# Altium PCB radarr.PcbDoc (part 1 of 3)
Units mm, origin at the board's own origin, x right, y up, seen from the top; angles counter-clockwise.
Board outline 98.42 x 99.44 mm, 4 copper layers (Top Layer, Signal Layer 1, Signal Layer 2, Bottom Layer), stack 1.596 mm thick; 146 components, 99 nets, 534 pads, 3373 vias.
Unrouted connection lines stored in the file: 90.
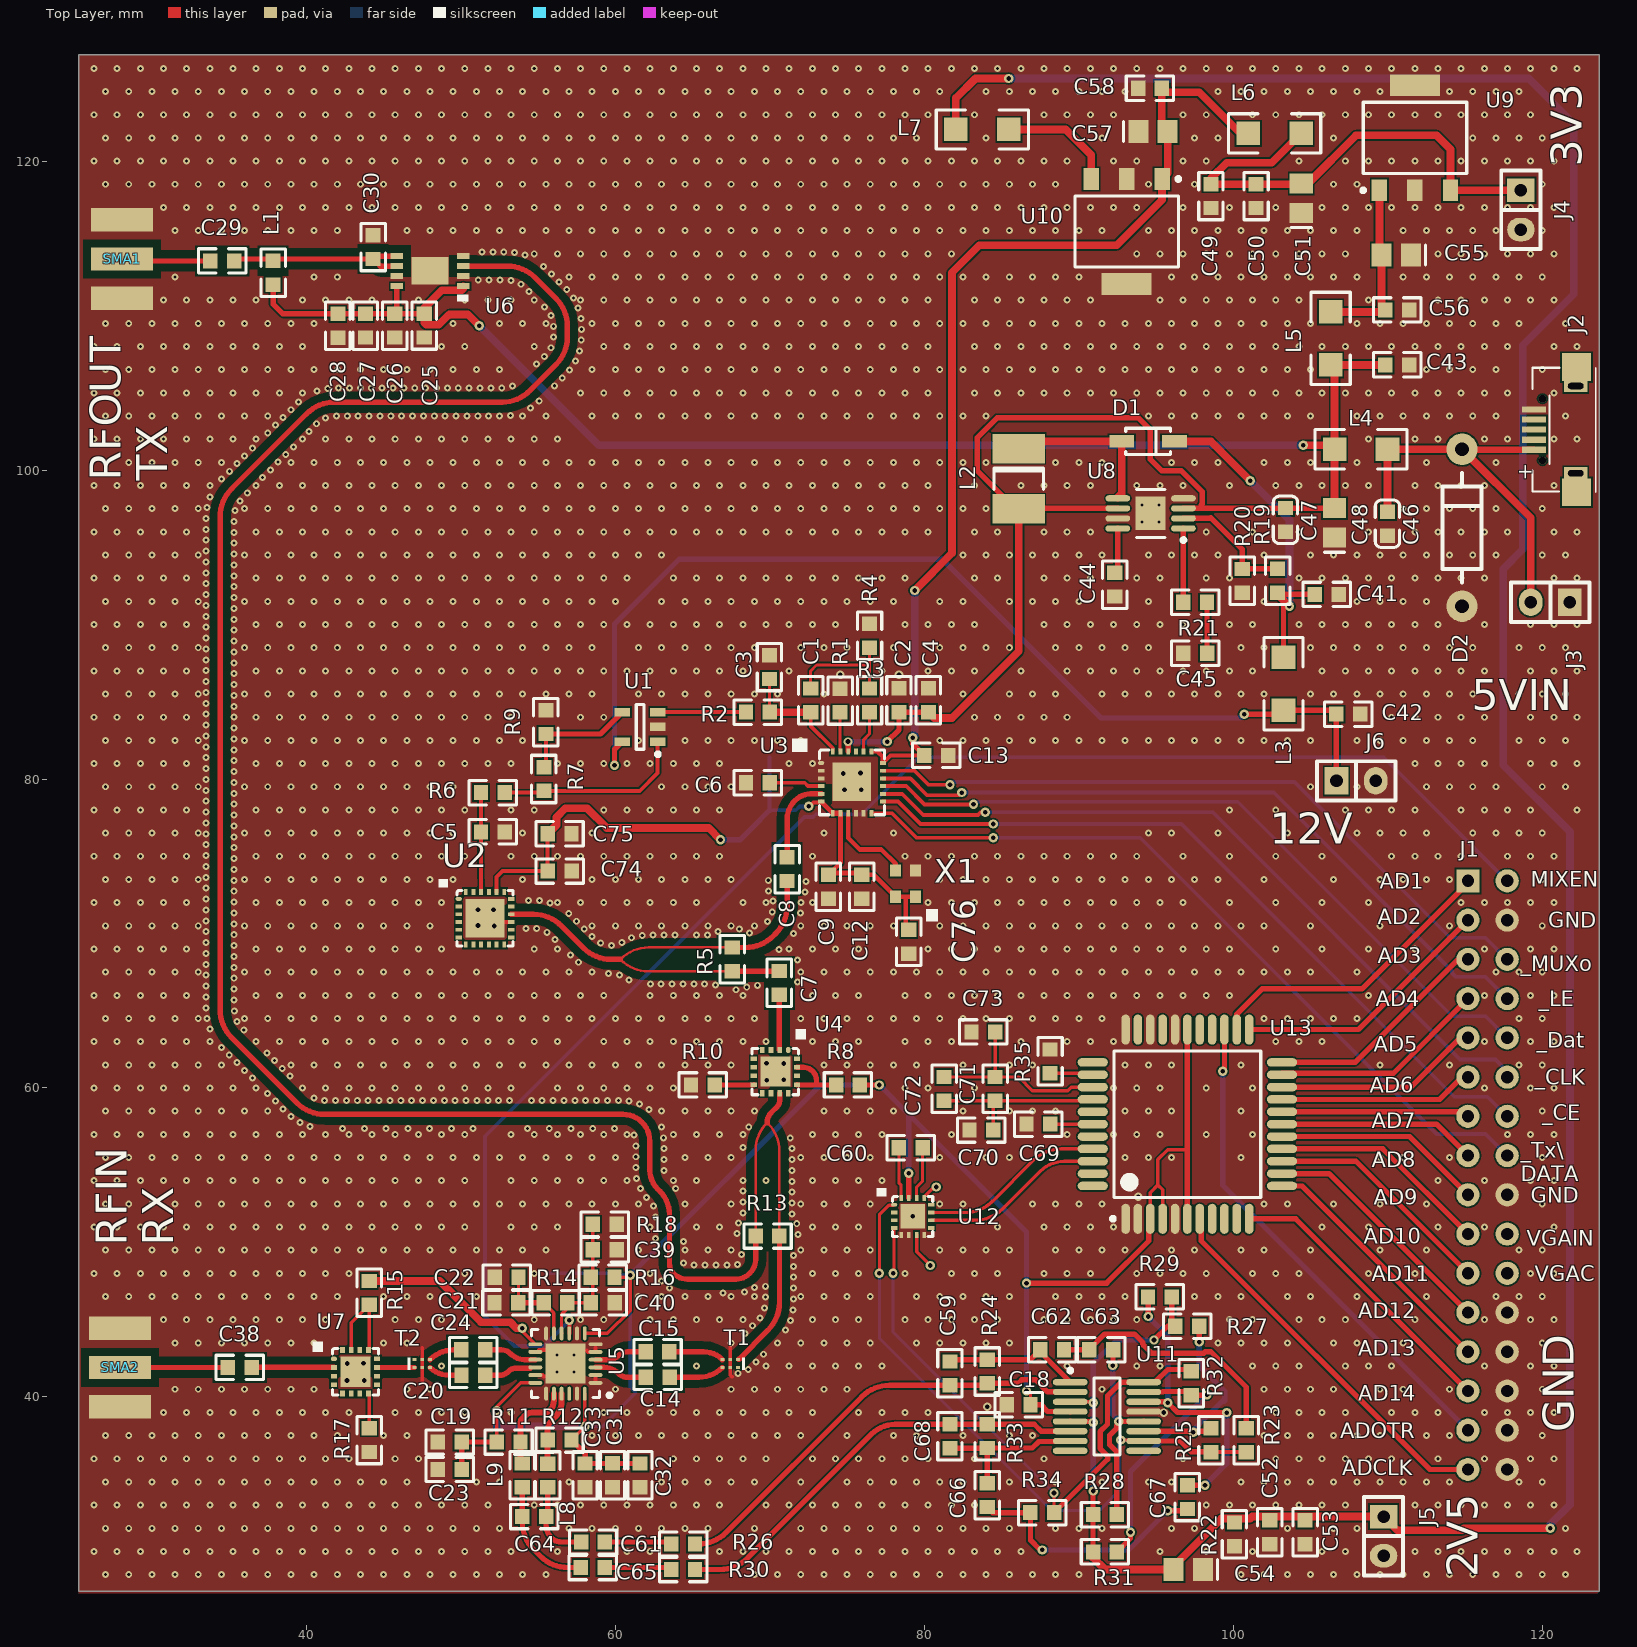
[diagram p0: Top Layer view]
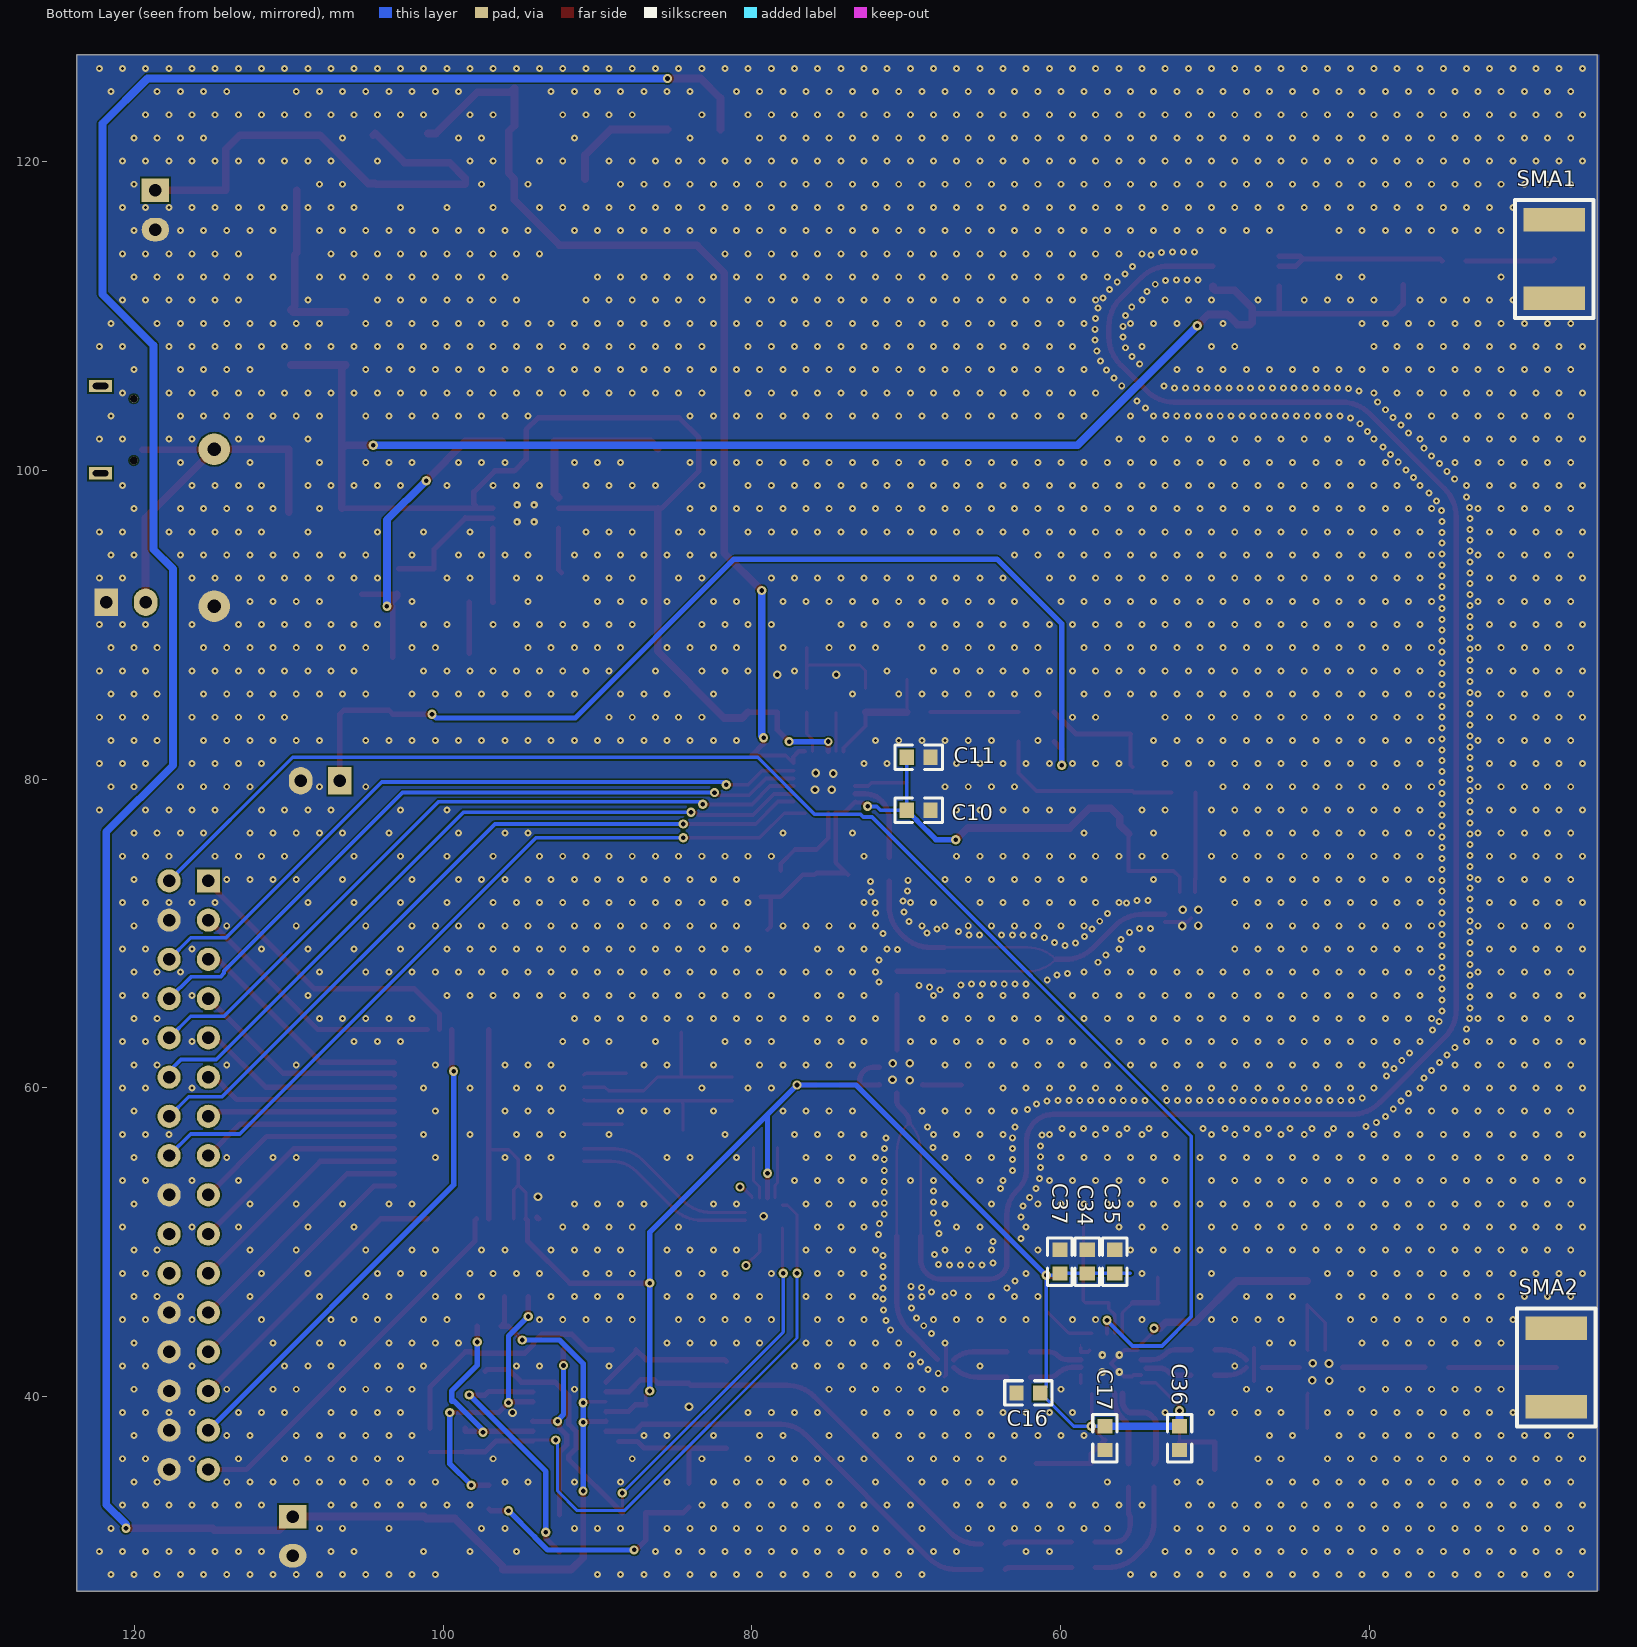
[diagram p1: Bottom Layer view, seen from below]
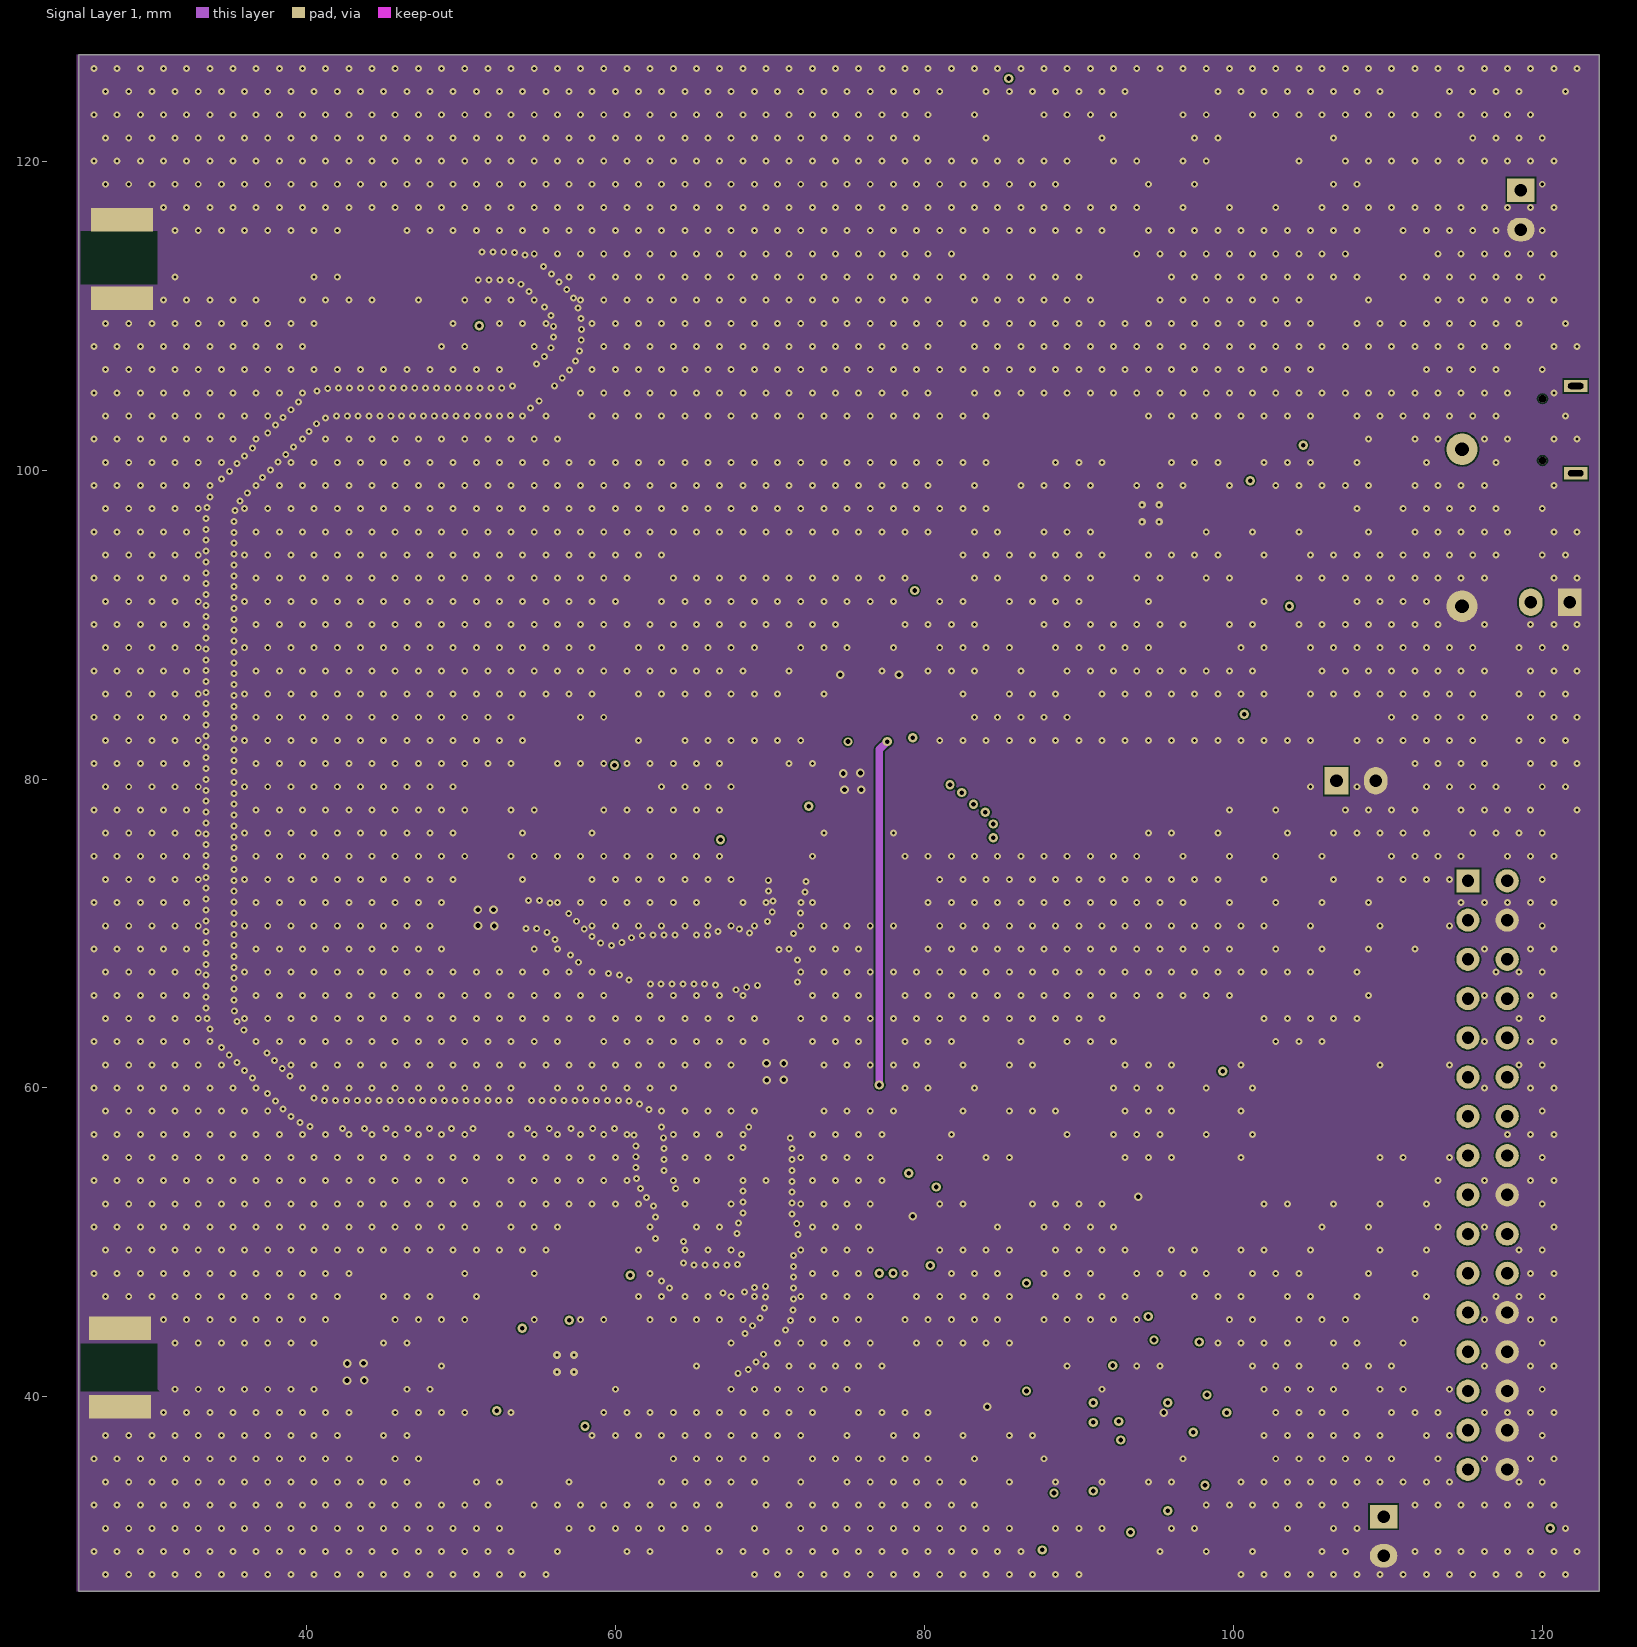
[diagram p2: Signal Layer 1]
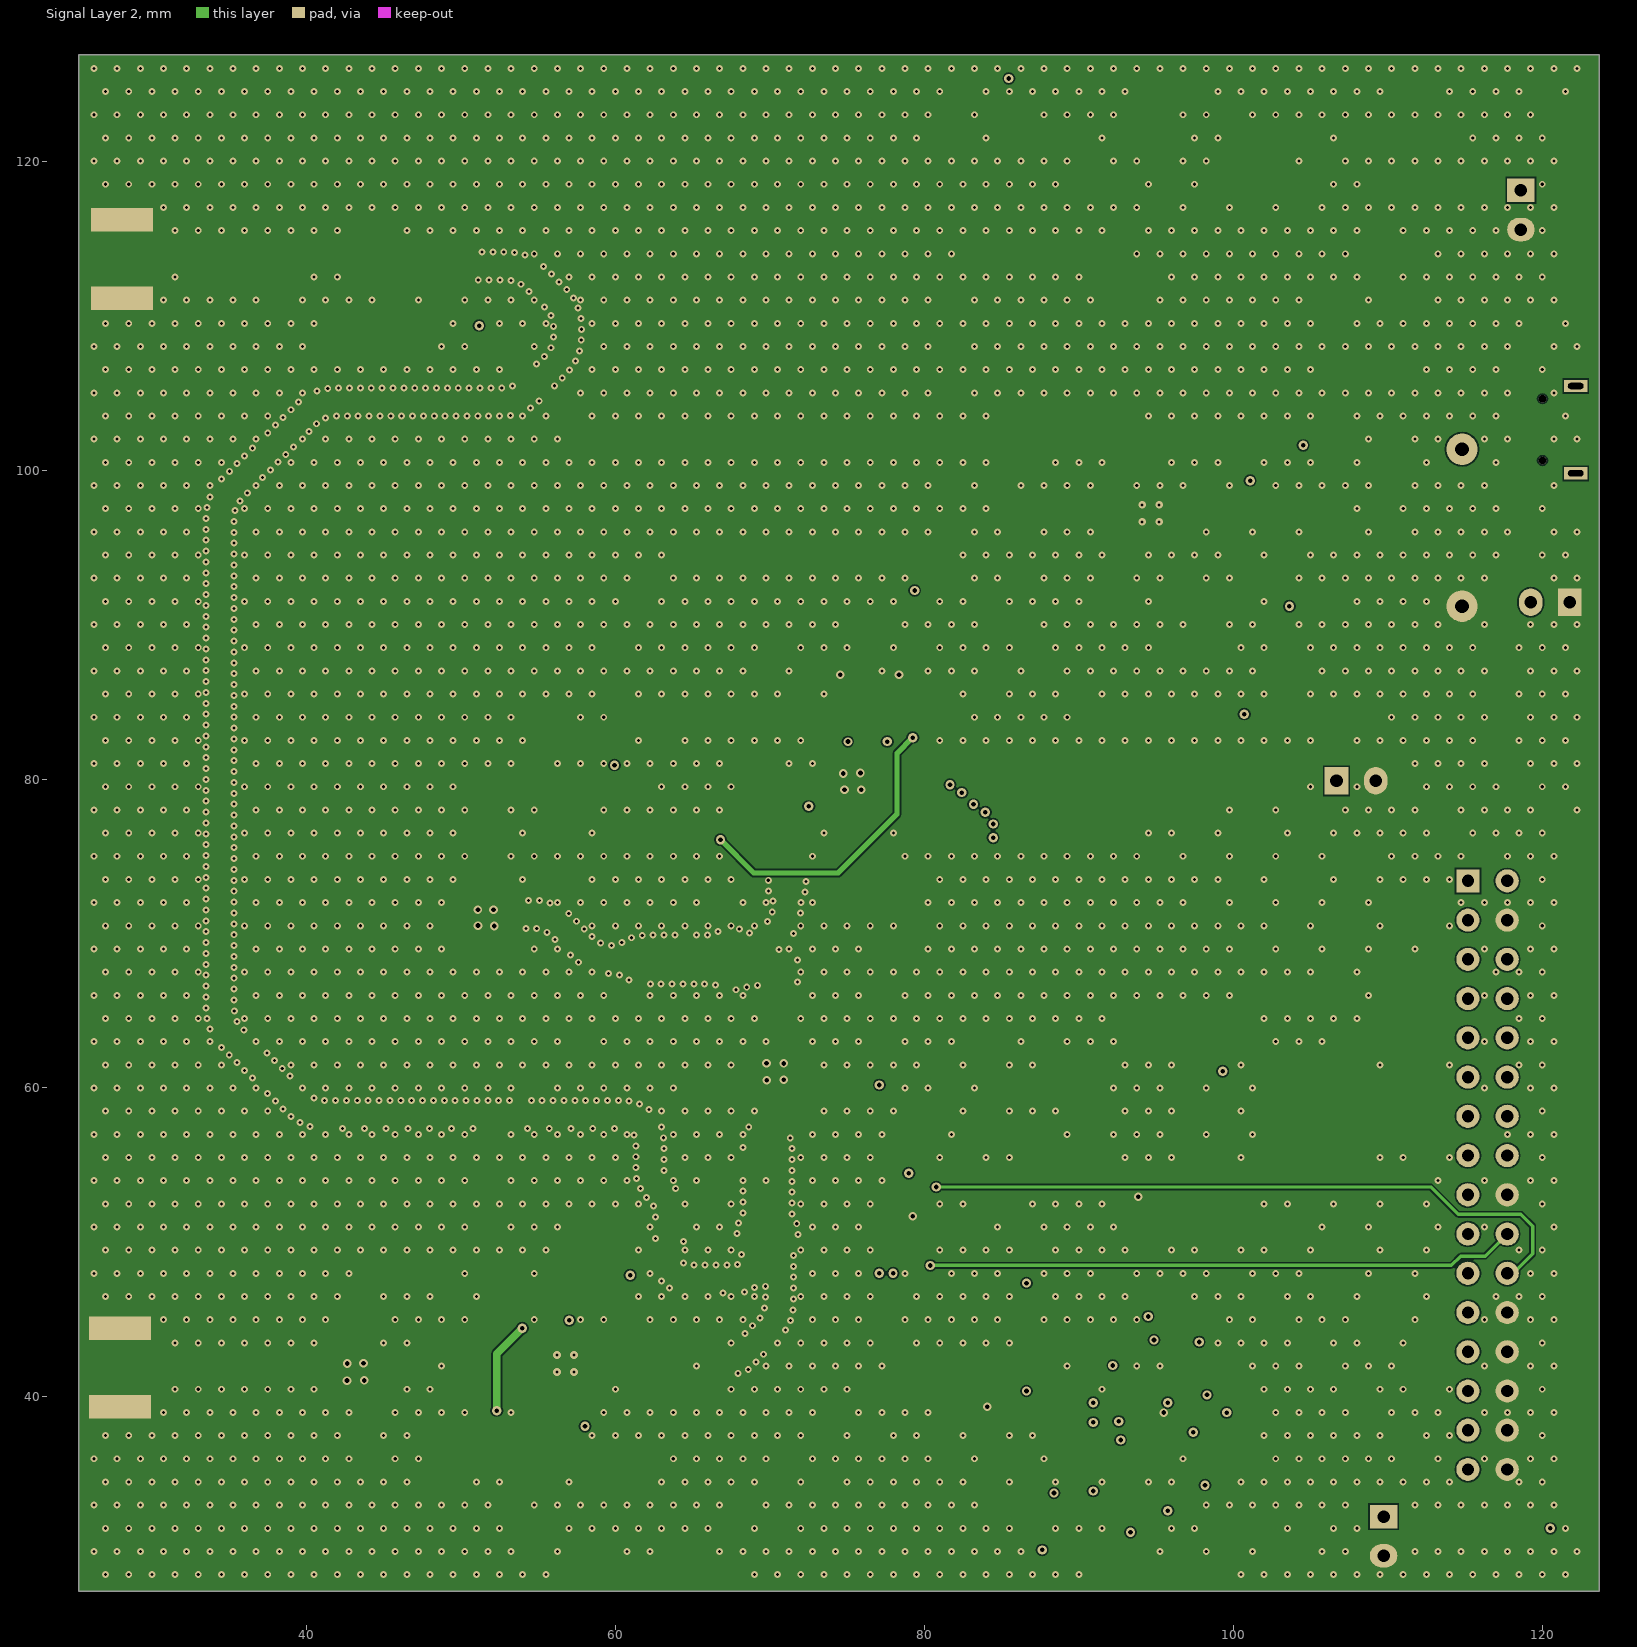
[diagram p3: Signal Layer 2]
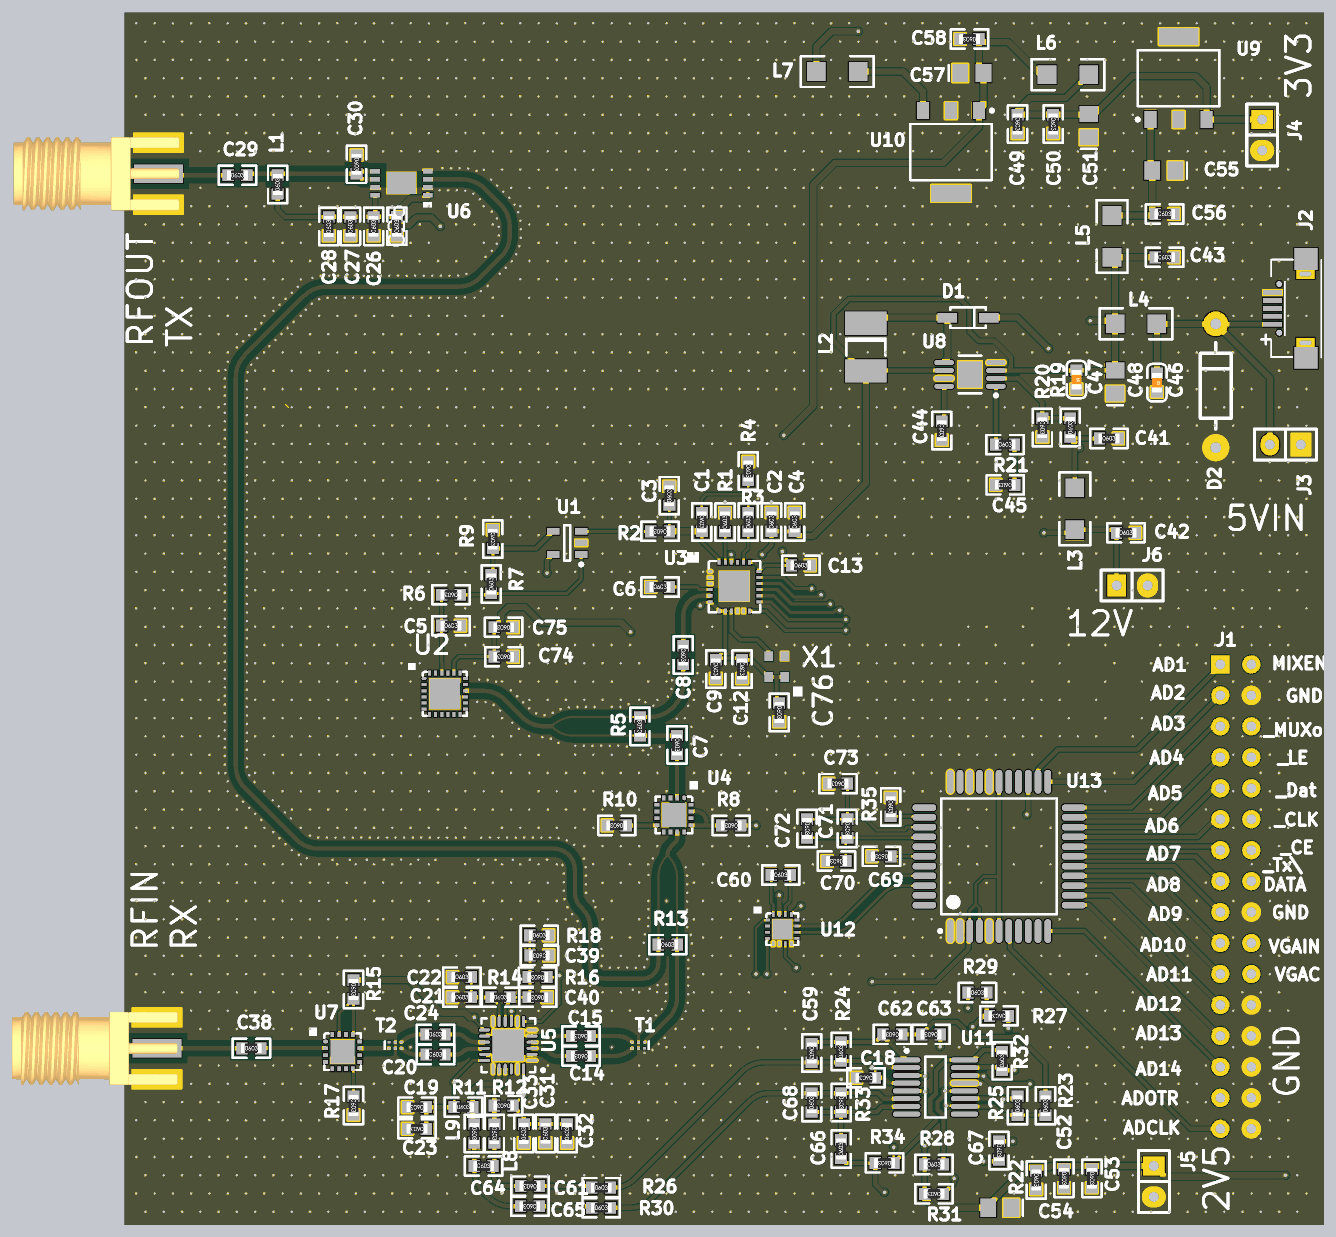
[diagram p6: 3D render of the assembled board from above, using the file's embedded part models]
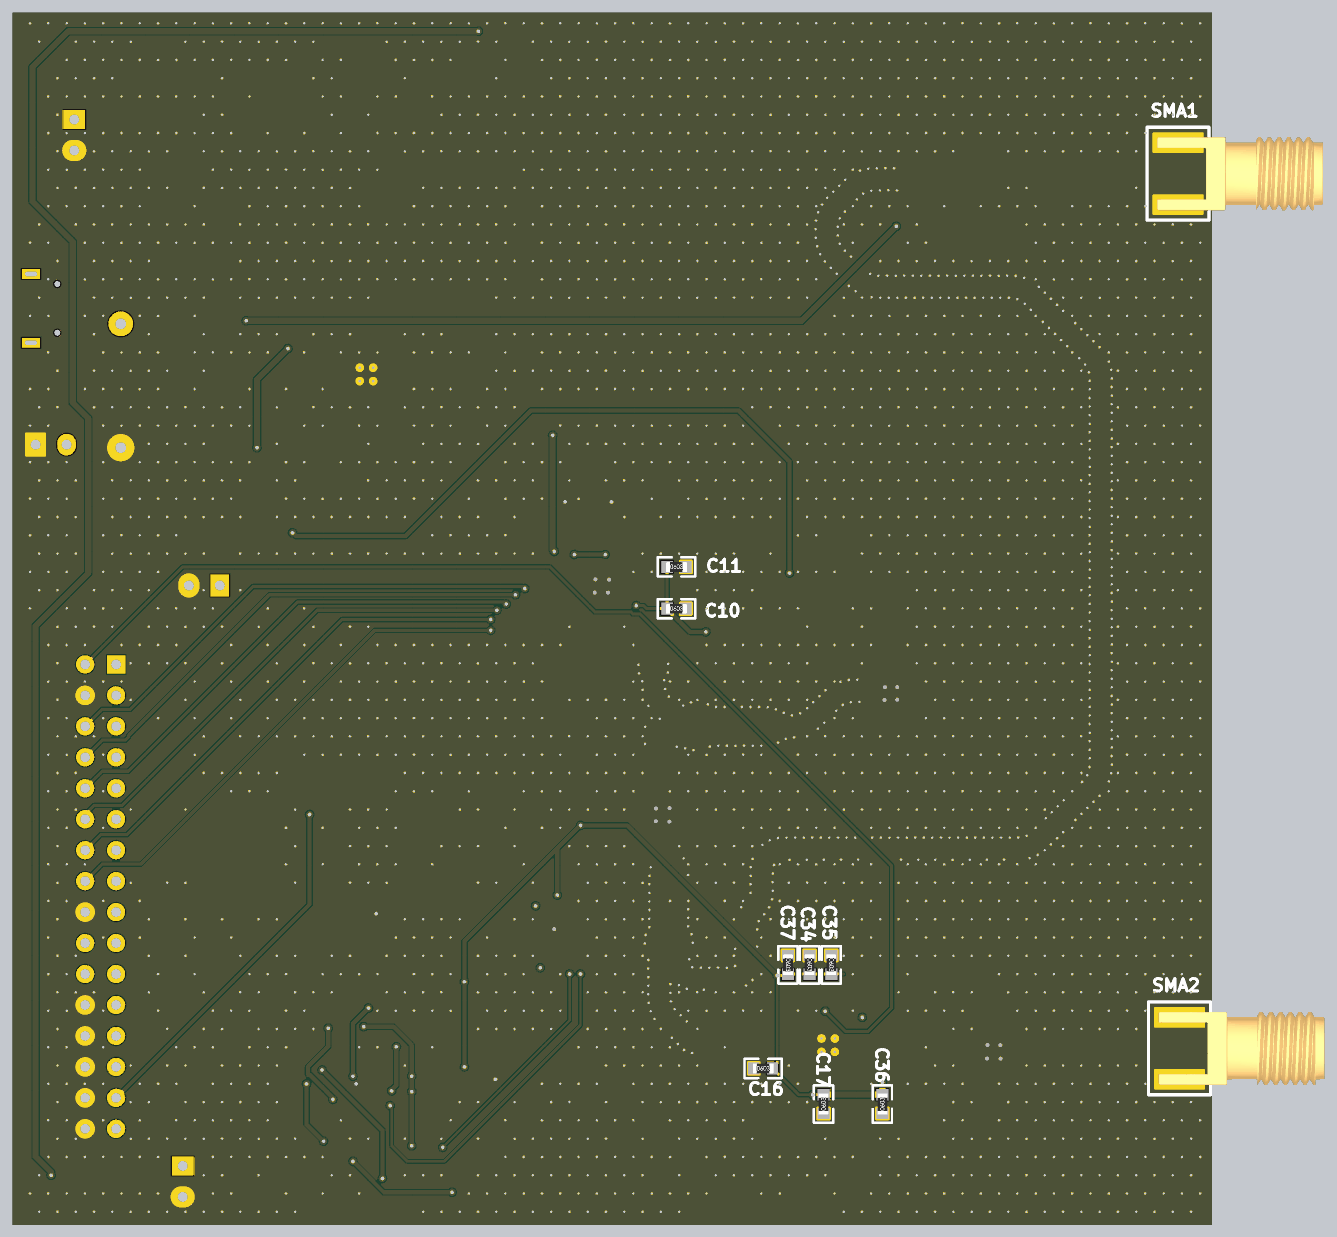
[diagram p7: 3D render of the assembled board from below, using the file's embedded part models]

## Layer stack, top to bottom
Top Solder: solder mask 0.0102, Solder Resist, Dk 3.5
Top Layer: signal copper 0.0356
Dielectric 1: prepreg 0.195, FR-4, Dk 4.2
Signal Layer 1: signal copper 0.0175
Dielectric 3: core 1.1, Dk 4.2
Signal Layer 2: signal copper 0.0175
Dielectric 2: prepreg 0.195, Dk 4.2
Bottom Layer: signal copper 0.0356
Bottom Solder: solder mask 0.0102, Solder Resist, Dk 3.5

## Board outline
25.273,27.432 123.698,27.432 123.698,126.873 25.273,126.873

## Design rules (kind name [scope] priority, off if disabled: settings)
Clearance Clearance_RF [InNetClass('RF') vs InNet('GND')] p1: gap=0.076 ignorepadtopadclearanceinfootprint=FALSE except(0.5: Arc-Fill Arc-Poly Arc-Region Track-Fill Track-Poly Track-Region SMDPad-Fill SMDPad-Poly SMDPad-Region THPad-Fill THPad-Poly THPad-Region Via-Fill Via-Poly Via-Region Fill-Fill Fill-Poly Fill-Region Poly-Poly Poly-Region Region-Region)
Clearance Clearance_2 [All] p2: gap=0.1 ignorepadtopadclearanceinfootprint=FALSE
DiffPairsRouting [All] p1: maxlimit=0.254 minlimit=0.254 mostfreqgap=0.254 toplayer_minwidth=0.381 toplayer_maxwidth=0.381 toplayer_prefwidth=0.381 midlayer1_minwidth=0.381 midlayer1_maxwidth=0.381 midlayer1_prefwidth=0.381 midlayer2_minwidth=0.381 midlayer2_maxwidth=0.381 midlayer2_prefwidth=0.381 bottomlayer_minwidth=0.381 bottomlayer_maxwidth=0.381 bottomlayer_prefwidth=0.381 maxuncoupledlength=12.7
HoleSize [All] p1 off: absolutevalues=TRUE maxlimit=2.54 minlimit=0.025 maxpercent=80.000 minpercent=20.000
HoleToHoleClearance [All] p1 off: gap=0.254 allowstackedmicrovias=TRUE
LayerPairs [All] p1 off: enforce=TRUE
MinimumSolderMaskSliver [All] p1 off: minsoldermaskwidth=0.254
NetAntennae [All] p1 off: netantennaetolerance=0
PolygonConnect [All] p1: connectstyle=Direct reliefconductorwidth=0.254 reliefentries=4 polygonreliefangle="90 Angle" airgapwidth=0.254
RoutingVias [All] p1: holewidth=0.711 width=1.27 viastyle="Through Hole" minholewidth=0.3 minwidth=0.6 maxholewidth=0.711 maxwidth=1.27
SilkToSilkClearance [All] p1 off: silktosilkclearance=0.254
SilkToSolderMaskClearance [IsPad] p1 off: minsilkscreentomaskgap=0.254 clearancetoexposedcopper=TRUE
SolderMaskExpansion [All] p1: expansion=0.102
Width [All] p1: maxlimit=3 minlimit=0.1 preferedwidth=0.345
22 further rules are at their usual default settings.

## Classes and differential pairs
net class RF: NetC7_1 NetC7_2 NetC8_1 NetC14_1 NetC14_2 NetC15_1 NetC15_2 NetC20_1 NetC20_2 NetC24_1 NetC24_2 NetC29_1 NetC29_2 NetC38_1 NetC38_2 NetR13_1 NetT2_1
component class Sheet3: C59 C60 C61 C62 C63 C64 C65 C66 C67 C68 C69 C70 C71 C72 C73 L8 L9 R23 R24 R25 R26 R27 R28 R29 R30 R31 R32 R33 R34 R35 U11 U12 U13
component class Sheet2: C41 C42 C43 C44 C45 C46 C47 C48 C49 C50 C51 C52 C53 C54 C55 C56 C57 C58 D1 D2 J1 J2 J3 J4 J5 J6 L2 L3 L4 L5 L6 L7 R19 R20 R21 R22 U8 U9 U10
component class Sheet1: C1 C2 C3 C4 C5 C6 C7 C8 C9 C10 C11 C12 C13 C14 C15 C16 C17 C18 C19 C20 C21 C22 C23 C24 C25 C26 C27 C28 C29 C30 C31 C32 C33 C34 C35 C36 C37 C38 C39 C40 C74 C75 C76 L1 R1 R2 R3 R4 R5 R6 R7 R8 R9 R10 R11 R12 R13 R14 R15 R16 R17 R18 SMA1 SMA2 T1 T2 U1 U2 U3 U4 U5 U6 U7 X1
differential pair IF: +IF_P -IF_N

## Components (designator, comment, footprint, x,y, rotation, side; value= is the part's Value field where it differs from the comment)
C1 "330p" 0603_R 72.644,85.09 r270 top
C2 "1000p" 0603_R 78.359,85.098 r90 top
C3 "470p" 0603_R 69.977,87.249 r90 top
C4 "100p" 0603_R 80.264,85.098 r90 top
C5 "10n" 0603_R 52.07,76.581 r0 top
C6 "100p" 0603_R 69.223,79.756 r0 top
C7 "2p" 0603_R 70.612,66.802 r270 top
C8 "2p" 0603_R 71.12,74.168 r270 top
C9 "0.1u" 0603_R 73.787,73.025 r270 top
C10 "0.1u" 0603_R 69.215,77.978 r180 bottom
C11 "0.1u" 0603_R 69.215,81.407 r180 bottom
C12 "0.1u" 0603_R 75.946,73.025 r270 top
C13 "0.1u" 0603_R 80.772,81.534 r0 top
C14 "2p" 0603_R 62.746,41.275 r180 top
C15 "2p" 0603_R 62.73,42.926 r180 top
C16 "0.1u" 0603_R 62.103,40.259 r180 bottom
C17 "0.1u" 0603_R 57.15,37.338 r90 bottom
C18 "1000p" 0603_R 86.106,39.497 r180 top
C19 "330p" 0603_R 49.276,37.084 r180 top
C20 "2p" 0603_R 50.808,41.402 r0 top
C21 "100p" 0603_R 52.951,46.101 r0 top
C22 "0.1u" 0603_R 52.959,47.752 r0 top
C23 "100p" 0603_R 49.276,35.306 r180 top
C24 "2p" 0603_R 50.8,43.053 r0 top
C25 "2.2u" 0603_R 47.625,109.355 r90 top
C26 "100p" 0603_R 45.72,109.347 r90 top
C27 "330p" 0603_R 43.815,109.347 r90 top
C28 "330p" 0603_R 42.037,109.339 r90 top
C29 "1.6p" 0603_R 34.552,113.538 r0 top
C30 "0.6p" 0603_R 44.323,114.435 r270 top
C31 "0.1u" 0603_R 59.817,34.933 r90 top
C32 "0.1u" 0603_R 61.595,34.925 r90 top
C33 "0.1u" 0603_R 58.039,34.925 r90 top
C34 "0.1u" 0603_R 58.293,48.76 r270 bottom
C35 "100p" 0603_R 56.515,48.76 r270 bottom
C36 "100p" 0603_R 52.324,37.338 r90 bottom
C37 "100p" 0603_R 60.071,48.76 r270 bottom
C38 "2p" 0603_R 35.687,41.91 r0 top
C39 "100p" 0603_R 59.317,49.53 r180 top
C40 "0.1u" 0603_R 59.182,46.101 r180 top
C41 "10u" 0603_R 106.045,91.948 r0 top
C42 "10u" 0603_R 107.442,84.201 r0 top
C43 "4.7u" 0603_R 110.617,106.807 r0 top
C44 "0.1u" 0603_R 92.329,92.583 r270 top
C45 "680n" 0603_R 97.536,88.138 r180 top
C46 "104" 0603_C 109.982,96.52 r270 top
C47 "104" 0603_C 103.378,96.774 r270 top
C48 "47uF X5R 6.3V" CD2012-0805 106.553,96.581 r270 top
C49 "104" 0603_R 98.552,117.737 r270 top
C50 "221" 0603_R 101.473,117.737 r270 top
C51 "47uF X5R 6.3V" CD2012-0805 104.394,117.602 r270 top
C52 "104" 0603_R 102.362,31.242 r270 top
C53 "221" 0603_R 104.648,31.242 r270 top
C54 "47uF X5R 6.3V" CD2012-0805 97.089,28.829 r0 top
C55 "47uF X5R 6.3V" CD2012-0805 110.551,113.919 r0 top
C56 "104" 0603_R 110.617,110.363 r0 top
C57 "47uF X5R 6.3V" CD2012-0805 94.803,121.92 r180 top
C58 "104" 0603_R 94.607,124.714 r180 top
C59 "10p" 0603_R 81.661,41.529 r270 top
C60 "0.1u" 0603_R 79.121,56.134 r0 top
C61 "330nF" 0603_R 58.555,30.607 r180 top
C62 "470p" 0603_R 88.273,43.053 r180 top
C63 "470p" 0603_R 91.448,43.053 r180 top
C64 "2.2nF" 0603_R 54.745,32.258 r0 top
C65 "330nF" 0603_R 58.539,28.956 r180 top
C66 "470p" 0603_R 84.074,33.647 r90 top
C67 "470p" 0603_R 97.028,33.52 r270 top
C68 "10p" 0603_R 81.661,37.457 r90 top
C69 "0.1u" 0603_R 87.384,57.658 r180 top
C70 "0.1u" 0603_R 83.693,57.277 r180 top
C71 "10u" 0603_R 84.582,59.944 r270 top
C72 "0.1u" 0603_R 81.28,59.944 r270 top
C73 "0.1u" 0603_R 83.82,63.627 r180 top
C74 "0.1u" 0603_R 56.396,74.041 r180 top
C75 "0.1u" 0603_R 56.388,76.454 r180 top
C76 "0.1u" 0603_R 78.994,69.469 r270 top
D1 "DFLS220" SOD123 94.488,101.854 r0 top
D2 "DIODE1" DIODE0.4A 115.316,96.266 r90 top
J1 "CON32" CON32 115.189,73.406 r0 top
J2 "MicroUSB" MICRO-USB 121.666,102.616 r90 top
J3 "CON2" SIP2 120.523,91.44 r180 top
J4 "CON2" SIP2 118.618,116.84 r270 top
J5 "CON2" SIP2 109.728,30.988 r270 top
J6 "CON2" SIP2 107.95,79.883 r0 top
L1 "3.9nH" 0603_R 37.846,112.776 r90 top
L2 "2.2uH" CD4532-1812 86.106,99.441 r90 top
L3 "MI1206K601R-10" 1206 103.251,87.884 r270 top
L4 "MI1206K601R-10" 1206 109.982,101.346 r180 top
L5 "MI1206K601R-10" 1206 106.299,106.807 r90 top
L6 "MI1206K601R-10" 1206 104.394,121.793 r180 top
L7 "MI1206K601R-10" 1206 85.471,122.047 r180 top
L8 "2.2uH" 0603_R 55.626,34.917 r270 top
L9 "2.2uH" 0603_R 53.975,34.925 r270 top
R1 "5.1k" 0603_R 74.549,85.082 r90 top
R2 "0" 0603_R 69.223,84.328 r180 top
R3 "69.8" 0603_R 76.454,85.09 r90 top
R4 "240" 0603_R 76.454,89.273 r270 top
R5 "100" 0603_R 67.564,68.326 r90 top
R6 "4.7k" 0603_R 52.07,79.121 r180 top
R7 "4.7k" 0603_R 55.372,80.002 r90 top
R8 "0" 0603_R 75.057,60.198 r180 top
R9 "4.7k" 0603_R 55.499,83.685 r270 top
R10 "825" 0603_R 65.667,60.198 r180 top
R11 "49.9" 0603_R 53.086,37.084 r0 top
R12 "49.9" 0603_R 56.388,37.211 r180 top
R13 "100" 0603_R 69.85,50.419 r0 top
R14 "DNP" 0603_R 56.126,46.101 r0 top
R15 "0" 0603_R 44.069,46.736 r270 top
R16 "1k" 0603_R 59.174,47.752 r180 top
R17 "825" 0603_R 44.069,37.211 r270 top
R18 "DNP" 0603_R 59.309,51.181 r0 top
R19 "87.5k" 0603_R 102.87,92.837 r90 top
R20 "9.76k" 0603_R 100.584,92.829 r270 top
R21 "16.5k" 0603_R 97.528,91.44 r0 top
R22 "1k" 0603_R 100.076,31.107 r270 top
R23 "910" 0603_R 100.838,37.203 r90 top
R24 "10k" 0603_R 84.074,41.648 r90 top
R25 "5k" 0603_R 98.552,37.203 r90 top
R26 "549" 0603_R 64.389,30.48 r0 top
R27 "1k" 0603_R 97.02,44.577 r180 top
R28 "130" 0603_R 91.694,32.385 r0 top
R29 "130" 0603_R 95.25,46.482 r0 top
R30 "549" 0603_R 64.389,28.829 r0 top
R31 "1k" 0603_R 91.694,29.972 r180 top
R32 "5k" 0603_R 97.282,40.886 r90 top
R33 "10k" 0603_R 84.074,37.465 r270 top
R34 "910" 0603_R 87.638,32.512 r180 top
R35 "2k" 0603_R 88.138,61.722 r270 top
SMA1 "SMA-Connector" SMA-2 28.067,113.665 r90 bottom
SMA2 "SMA-Connector" SMA-2 27.94,41.91 r90 bottom
T1 "5400BL15B050" 0603-6 67.691,41.656 r270 top
T2 "5400BL15B050" 0603-6 47.244,42.672 r90 top
U1 "TLV271CBDV" LT-S5-5-TSOT-23_L 61.602,83.378 r180 top
U2 "HMC431" LCC24-HMC431 49.862,72.243 r0 top
U3 "ADF4158" LCC24_ADF4158 73.323,81.038 r0 top
U4 "HMC717A" LCC16-717A 71.195,62.461 r270 top
U5 "ADL5801ACPZ-R7" ADI-CP-24-3_N 56.769,42.164 r180 top
U6 "HMC406" HMC406 48.756,113.053 r180 top
U7 "HMC717A" LCC16-717A 41.777,42.47 r0 top
U8 "LT3489EMS8E" LT-MS8E-8-2060X1830TP_N 94.649,97.196 r180 top
U9 "LT1963AEST-3.3" LT-ST-3-SOT-223_N 111.76,121.51 r90 top
U10 "LT1963AEST-2.5" LT-ST-3-SOT-223_N 93.091,115.443 r270 top
U11 "LT6232CGN" LT-GN-16_N 91.821,38.735 r0 top
U12 "AD8338" LCC16-AD8338 78.048,52.439 r0 top
U13 "AD9240AS" S-44-1_N 97.028,57.658 r90 top
X1 "SG210STF" SG210STF 78.867,73.279 r90 top

## Footprints (in the part's own frame and the unit in brackets; to place one, negate y for a bottom-side part, rotate by r counter-clockwise, add the part's x,y. Pads: shape width x height; smd on the part's side, far side on the other; paste and mask are expansions set on the pad)
0603-6 [mil]
  rect 8x10 smd mask+1.97: 1(-30,10) 2(-30,-10) 3(-30,-30) 4(-10,-30) 5(-10,-10) 6(-10,10)
  silkscreen extent -36,20 -4,28
0603_C [mm]
  rect 0.93x0.98 smd: 1(-0.77,0) 2(0.77,0)
  silkscreen extent -1.53,-0.79 1.54,0.79, body extent -0.8,-0.4 0.8,0.4, height 0.3
0603_R [mm]
  rect 0.93x0.98 smd: 1(-0.77,0) 2(0.77,0)
  silkscreen extent -1.53,-0.79 1.54,0.79, body extent -0.85,-0.4 0.85,0.4, height 0.56
1206 [mil]
  rect 60x60 smd: 1(0,0) 2(135,0)
  silkscreen extent -50,-50 185,50
ADI-CP-24-3_N [mm] "QFN, 24-Leads, Body 4x4mm, Pitch 0.5mm, Thermal Pad 2.5x2.5mm, IPC Medium Density"
  oval 0.9x0.25 smd: 1(-1.95,1.25) 2(-1.95,0.75) 3(-1.95,0.25) 4(-1.95,-0.25) 5(-1.95,-0.75) 6(-1.95,-1.25) 13(1.95,-1.25) 14(1.95,-0.75) 15(1.95,-0.25) 16(1.95,0.25) 17(1.95,0.75) 18(1.95,1.25)
  oval 0.25x0.9 smd: 7(-1.25,-1.95) 8(-0.75,-1.95) 9(-0.25,-1.95) 10(0.25,-1.95) 11(0.75,-1.95) 12(1.25,-1.95) 19(1.25,1.95) 20(0.75,1.95) 21(0.25,1.95) 22(-0.25,1.95) 23(-0.75,1.95) 24(-1.25,1.95)
  rect 2.6x2.6 smd: 25(0,0)
  silkscreen extent -2.98,-2.2 2.2,2.2, body extent -2.05,-2.05 2.05,2.05, height 1
CD2012-0805 [mm] "Chip Diode; Body 2.0 x 1.3 mm (LxW typ)"
  rect 1.3x1.5 smd: 1(-0.95,0) 2(0.95,0)
  silkscreen extent 1.9,-0.65 1.9,0.65
CD4532-1812 [mm] "Chip Diode; Body 4.5 x 3.2 mm (LxW typ)"
  rect 1.9x3.4 smd: 1(-1.95,0) 2(1.95,0)
  silkscreen extent -0.7,-1.6 0.7,1.6
CON32 [mm]
  rect 1.5x1.5 hole 0.8 mask+0.05: 1(0,0)
  round 1.5 hole 0.8 mask+0.05: 2(0,-2.54) 3(0,-5.08) 4(0,-7.62) 5(0,-10.16) 6(0,-12.7) 7(0,-15.24) 8(0,-17.78) 9(0,-20.32) 10(0,-22.86) 11(0,-25.4) 12(0,-27.94) 13(0,-30.48) 14(0,-33.02) 15(0,-35.56) 16(0,-38.1) 17(2.54,0) 18(2.54,-2.54) 19(2.54,-5.08) 20(2.54,-7.62) 21(2.54,-10.16) 22(2.54,-12.7) 23(2.54,-15.24) 24(2.54,-17.78) 25(2.54,-20.32) 26(2.54,-22.86) 27(2.54,-25.4) 28(2.54,-27.94) 29(2.54,-30.48) 30(2.54,-33.02) 31(2.54,-35.56) 32(2.54,-38.1)
DIODE0.4A [mil]
  round 80 hole 35: A(-200,20) K(200,20)
  silkscreen extent -140,-30 140,70
HMC406 [mm]
  rect 0.8x0.38 smd mask+0.05: 1(-1.4,1.15) 2(-1.4,0.5) 3(-1.4,-0.15) 4(-1.4,-0.8) 5(2.9,-0.8) 6(2.9,-0.15) 7(2.9,0.5) 8(2.9,1.15)
  rect 2.41x1.78 smd mask+0.05: 9(0.75,0.15)
  silkscreen extent -1.75,1.7 -1,2.15
LCC16-717A [mm]
  oval 0.4x0.3 smd: 1(0,0)
  rect 0.4x0.3 smd: 2(0,-0.56) 3(0,-1.12) 4(0,-1.68) 9(2.8,-1.68) 10(2.8,-1.12) 11(2.8,-0.56) 12(2.8,0)
  rect 0.3x0.4 smd: 5(0.56,-2.24) 6(1.12,-2.24) 7(1.68,-2.24) 8(2.24,-2.24) 13(2.24,0.56) 14(1.68,0.56) 15(1.12,0.56) 16(0.56,0.56)
  rect 1.95x1.95 smd mask+0.05: 17(1.4,-0.84)
  silkscreen extent -1.37,-2.34 2.9,1.13
LCC16-AD8338 [mm]
  oval 0.4x0.23 smd: 1(0,0)
  rect 0.4x0.23 smd: 2(0,-0.5) 3(0,-1) 4(0,-1.5) 9(2.4,-1.5) 10(2.4,-1) 11(2.4,-0.5) 12(2.4,0)
  rect 0.23x0.4 smd: 5(0.45,-1.95) 6(0.95,-1.95) 7(1.45,-1.95) 8(1.95,-1.95) 13(1.95,0.45) 14(1.45,0.45) 15(0.95,0.45) 16(0.45,0.45)
  rect 1.6x1.6 smd mask+0.05: 17(1.2,-0.75)
  silkscreen extent -1.15,-2.05 2.5,1.1
LCC24-HMC431 [mm]
  oval 0.4x0.25 smd: 1(0,0)
  rect 0.4x0.25 smd: 2(0,-0.5) 3(0,-1) 4(0,-1.5) 5(0,-2) 6(0,-2.5) 13(3.4,-2.5) 14(3.4,-2) 15(3.4,-1.5) 16(3.4,-1) 17(3.4,-0.5) 18(3.4,0)
  rect 0.25x0.4 smd: 7(0.45,-2.95) 8(0.95,-2.95) 9(1.45,-2.95) 10(1.95,-2.95) 11(2.45,-2.95) 12(2.95,-2.95) 19(2.95,0.45) 20(2.45,0.45) 21(1.95,0.45) 22(1.45,0.45) 23(0.95,0.45) 24(0.45,0.45)
  rect 2.5x2.5 smd mask+0.05: 25(1.7,-1.25)
  silkscreen extent -1.31,-3.05 3.5,1.28
LCC24_ADF4158 [mm]
  oval 0.4x0.25 smd: 1(0,0)
  rect 0.4x0.25 smd: 2(0,-0.5) 3(0,-1) 4(0,-1.5) 5(0,-2) 6(0,-2.5) 13(4,-2.5) 14(4,-2) 15(4,-1.5) 16(4,-1) 17(4,-0.5) 18(4,0)
  rect 0.25x0.4 smd: 7(0.75,-3.25) 8(1.25,-3.25) 9(1.75,-3.25) 10(2.25,-3.25) 11(2.75,-3.25) 12(3.25,-3.25) 19(3.25,0.75) 20(2.75,0.75) 21(2.25,0.75) 22(1.75,0.75) 23(1.25,0.75) 24(0.75,0.75)
  rect 2.5x2.5 smd mask+0.05: 25(1.98,-1.21)
  silkscreen extent -1.88,-3.35 4.1,1.59
LT-GN-16_N [mm] "SOP, 16-Leads, Body 4.9x3.9mm, Pitch 0.635mm, IPC Medium Density"
  oval 2.25x0.4 smd: 1(-2.375,2.222) 2(-2.375,1.587) 3(-2.375,0.953) 4(-2.375,0.318) 5(-2.375,-0.318) 6(-2.375,-0.953) 7(-2.375,-1.587) 8(-2.375,-2.222) 9(2.375,-2.222) 10(2.375,-1.587) 11(2.375,-0.953) 12(2.375,-0.318) 13(2.375,0.318) 14(2.375,0.953) 15(2.375,1.587) 16(2.375,2.222)
  silkscreen extent -2.5,-2.5 0.85,3.1, body extent -2,-2.5 2,2.5, height 1.75
LT-MS8E-8-2060X1830TP_N [mm] "SOP, 8-Leads, Body 3.1x3.1mm, Pitch 0.65mm, Thermal Pad 2.162x1.932mm, IPC Medium Density"
  oval 1.6x0.4 smd: 1(-2.125,0.975) 2(-2.125,0.325) 3(-2.125,-0.325) 4(-2.125,-0.975) 5(2.125,-0.975) 6(2.125,-0.325) 7(2.125,0.325) 8(2.125,0.975)
  rect 1.932x2.162 smd: 9(0,0)
  silkscreen extent -2.25,-1.55 0.92,1.85, body extent -1.55,-1.55 1.55,1.55, height 1.1
LT-S5-5-TSOT-23_L [mm] "SOT23, 5-Leads, Body 2.90x1.63mm, Pitch 0.95mm, IPC High Density"
  rect 1x0.55 smd: 1(-1.15,0.95) 2(-1.15,0) 3(-1.15,-0.95) 4(1.15,-0.95) 5(1.15,0.95)
  silkscreen extent -1.28,-1.45 0.25,1.9, body extent -0.87,-1.45 0.87,1.45, height 1
LT-ST-3-SOT-223_N [mm] "SOT223, 4-Leads, Body 6.505x3.505mm, Pitch 2.3mm, IPC Medium Density"
  rect 1.4x1 smd: 1(-3.4,2.3) 2(-3.4,0) 3(-3.4,-2.3)
  rect 1.4x3.25 smd: 4(3.4,0)
  silkscreen extent -3.52,-3.35 2.3,3.47, body extent -1.86,-3.35 1.86,3.35, height 1.8
MICRO-USB [mm]
  rect 0.4x1.55 smd: 1(-1.3,2.2) 2(-0.65,2.2) 3(0,2.2) 4(0.65,2.2) 5(1.3,2.2)
  rect 1.8x1.9 smd: 6(-4.05,-0.55) 6(4.05,-0.55)
  rect 0.8x1.5 hole 0.4 slot 1 at 90 deg: 6(-2.825,-0.5) 6(2.825,-0.5)
  round 0.5 hole 0.5 unplated: ""(-2,1.65) ""(2,1.65)
  silkscreen extent -4.05,-1.8 4,2.3
S-44-1_N [mm] "QFP, 44-Leads, Body 10x10mm, Pitch 0.8mm, IPC Medium Density"
  oval 1.95x0.55 smd: 1(-6.125,4) 2(-6.125,3.2) 3(-6.125,2.4) 4(-6.125,1.6) 5(-6.125,0.8) 6(-6.125,0) 7(-6.125,-0.8) 8(-6.125,-1.6) 9(-6.125,-2.4) 10(-6.125,-3.2) 11(-6.125,-4) 23(6.125,-4) 24(6.125,-3.2) 25(6.125,-2.4) 26(6.125,-1.6) 27(6.125,-0.8) 28(6.125,0) 29(6.125,0.8) 30(6.125,1.6) 31(6.125,2.4) 32(6.125,3.2) 33(6.125,4)
  oval 0.55x1.95 smd: 12(-4,-6.125) 13(-3.2,-6.125) 14(-2.4,-6.125) 15(-1.6,-6.125) 16(-0.8,-6.125) 17(0,-6.125) 18(0.8,-6.125) 19(1.6,-6.125) 20(2.4,-6.125) 21(3.2,-6.125) 22(4,-6.125) 34(4,6.125) 35(3.2,6.125) 36(2.4,6.125) 37(1.6,6.125) 38(0.8,6.125) 39(0,6.125) 40(-0.8,6.125) 41(-1.6,6.125) 42(-2.4,6.125) 43(-3.2,6.125) 44(-4,6.125)
  silkscreen extent -6.25,-4.75 4.75,4.95, body extent -5,-5 5,5, height 2.45
SG210STF [mm]
  rect 0.8x0.7 smd mask+0.05: 1(-0.9,-0.57) 2(0.8,-0.57) 3(0.8,0.73) 4(-0.9,0.73)
  silkscreen extent -2.49,-2.03 -1.69,-1.24
SIP2 [mil]
  rect 60x70 hole 32: 1(-50,0)
  oval 60x70 hole 32: 2(50,0)
  silkscreen extent -100,-50 100,50
SMA-2 [mm]
  rect 1.5x4 smd far side: 1(0,0)
  rect 1.5x4 all layers, no hole: 2(2.54,0) 3(-2.54,0)
  silkscreen extent -3.81,-2.54 3.81,2.54, body extent -3,-11.89 3,1.71, height 3.2
SOD123 [mm] "SOD-123; 2 Leads; Body 2.7 x 1.6 mm, (LxW)"
  rect 1.6x0.8 smd: 1(-1.7,0) 2(1.7,0)
  silkscreen extent -1.45,-0.85 1.45,0.85

## Part data
C1 C2 C3 C4 C5 C6 C7 C8 C9 C10 C11 C12 C13 C14 C15 C16 C17 C18 C19 C20 C21 C22 C23 C24 C25 C26 C27 C28 C29 C30 C31 C32 C33 C34 C35 C36 C37 C38 C39 C40 C41 C42 C43 C44 C45 C46 C47 C48 C49 C50 C51 C52 C53 C54 C55 C56 C57 C58 C59 C60 C61 C62 C63 C64 C65 C66 C67 C68 C69 C70 C71 C72 C73 C74 C75 C76: library part CAP, "Capacitor"
D1: library part "DIODE SCHOTTKY", "Schottky Diode"
J1: "Connector"
L1 L2 L3 L4 L5 L6 L7 L8 L9: library part INDUCTOR
R1 R2 R3 R4 R5 R6 R7 R8 R9 R10 R11 R12 R13 R14 R15 R16 R17 R18 R19 R20 R21 R22 R23 R24 R25 R26 R27 R28 R29 R30 R31 R32 R33 R34 R35: library part RES1
U3: library part ADF4518
U5: "High IP3, 10 MHz to 6 GHz, Active Mixer, 130mA Supply Current, CP-24-3, Pb-Free, 1500 Reel", IF Frequency (MHz)="LF to 3000", LO Frequency (MHz)="10 to 6000", Code_JEDEC=MO-220-VGGD-8, ComponentLink1Description="Manufacturer URL", ComponentLink1URL=www.analog.com, ComponentLink2Description=Datasheet, ComponentLink2URL=http://www.analog.com/static/imported-files/data_sheets/ADL5801.pdf, ComponentLink3Description="Package Specification", ComponentLink3URL=http://www.analog.com/static/imported-files/packages/56702234806764CP_24_3.pdf, Conversion Gain (dB)=1.8dB, DatasheetVersion="Rev. A", IP3 (dBm)=28.5, NF (dB)=9.75dB, P1dB (dBm)=13.3, PackageDescription="24-Lead Lead Frame Chip Scale Package [LFCSP_VQ]", PackageReference=CP-24-3, PackageVersion=Jan-2005, RF Frequency (MHZ)="10 to 6000"
U8: "2 MHz Boost DC/DC Converter with 2.5 A Switch and Soft-Start, 8-pin SOP (MS8E-8), -40 to 85 degC", Manufacturer="Linear Technology", ComponentLink1Description="Manufacturer URL", ComponentLink1URL=http://www.linear.com/, ComponentLink2Description=Datasheet, ComponentLink2URL=http://cds.linear.com/docs/en/datasheet/3489f.pdf, ComponentLink3Description="Package Specification", ComponentLink3URL=http://cds.linear.com/docs/en/datasheet/4070fc.pdf, Mounting Technology="Surface Mount", Number of Outputs=1, PackageDescription="8-Pin Plastic MSOP, Exposed Die Pad, Body 3 x 3 mm, Pitch 0.65 mm", PackageReference=MS8E-8, PackageVersion="Rev. E", PartNumber=LT3489EMS8E, RoHS=FALSE
U9: "1.5 A, Low Noise, Fast Transient Response LDO Regulator, 2.1 to 20 V Vin, 3.3 V Vout, 3-pin SOT223 (ST-3), -40 to 125 degC", Dropout Voltage(V)=0.34, Manufacturer="Linear Technology", Output Voltage="3.3 V", Shutdown Current(uA)=0.01, Supplier Part Number 1=LT1963AEST-3.3-ND, ComponentLink1Description="Manufacturer URL", ComponentLink1URL=http://www.linear.com/, ComponentLink2Description=Datasheet, ComponentLink2URL=http://cds.linear.com/docs/en/datasheet/1963afe.pdf, ComponentLink3Description="Package Specification", ComponentLink3URL=http://cds.linear.com/docs/en/packaging/SOT_3_05-08-1630.pdf, DatasheetVersion="Rev. E", Discrete Pass Element=no, Iout(mA)=1500, Isupply(mA)=1, Mounting Technology="Surface Mount", Noise(uV)=40, Number of Outputs=1, PackageDescription="3-Pin Plastic SOT-223, 3.505 x 6.505 mm Body, Pitch 2.3 mm", PackageReference=ST-3, PackageVersion=Jun-10, PartNumber=LT1963AEST-3.3, PSRR(dB)=63, RoHS=FALSE, Supplier 1=Digi-Key, Supplier 2=Newark, Supplier Part Number 2=57M7458, Vin Max(V)=20, Vin Min(V)=2.1
U10: library part LT1963AEST-3.3, "1.5 A, Low Noise, Fast Transient Response LDO Regulator, 2.1 to 20 V Vin, 3.3 V Vout, 3-pin SOT223 (ST-3), -40 to 125 degC", Dropout Voltage(V)=0.34, Manufacturer="Linear Technology", Output Voltage="3.3 V", Shutdown Current(uA)=0.01, Supplier Part Number 1=LT1963AEST-3.3-ND, ComponentLink1Description="Manufacturer URL", ComponentLink1URL=http://www.linear.com/, ComponentLink2Description=Datasheet, ComponentLink2URL=http://cds.linear.com/docs/en/datasheet/1963afe.pdf, ComponentLink3Description="Package Specification", ComponentLink3URL=http://cds.linear.com/docs/en/packaging/SOT_3_05-08-1630.pdf, DatasheetVersion="Rev. E", Discrete Pass Element=no, Iout(mA)=1500, Isupply(mA)=1, Mounting Technology="Surface Mount", Noise(uV)=40, Number of Outputs=1, PackageDescription="3-Pin Plastic SOT-223, 3.505 x 6.505 mm Body, Pitch 2.3 mm", PackageReference=ST-3, PackageVersion=Jun-10, PartNumber=LT1963AEST-3.3, PSRR(dB)=63, RoHS=FALSE, Supplier 1=Digi-Key, Supplier 2=Newark, Supplier Part Number 2=57M7458, Vin Max(V)=20, Vin Min(V)=2.1
U11: "Quad Channel, Ultralow Noise, Low Power, High Speed Operational Amplifier, 215 MHz Typical GBW, 70 V/us Typical SR, 3 to 12.6 V, 16-Pin SOP (GN-16), Commercial", Linear Technology Part Number=LT6232, Manufacturer="Linear Technology", Supplier Part Number 1=LT6232CGN-ND, Channels (#)=4, ComponentLink1Description="Manufacturer URL", ComponentLink1URL=http://www.linear.com/, ComponentLink2Description=Datasheet, ComponentLink2URL=http://cds.linear.com/docs/en/datasheet/623012fc.pdf, ComponentLink3Description="Package Specification", ComponentLink3URL=http://cds.linear.com/docs/en/packaging/05081641_B_GN16.pdf, DatasheetVersion="Rev. C", GBW (MHz) Typical=215, Is (mA) Typical=3.3, Mounting Technology="Surface Mount", PackageDescription="16-Lead Plastic SSOP, Body 4.9 x 3.9 mm, Pitch 0.635 mm", PackageReference=LT-GN-16, PackageVersion="Rev B", PartNumber=LT6232CGN, SR (V/us) Typical=70, Supplier 1=Digi-Key, Type=VFB, Vos (mV) Guaranteed=0.35, Vos (mV) Typical=0.05, Vs Max (V)=12.6, Vs Min (V)=3
U13: "Single 14-Bit Monolithic Analog-to-Digital Converter with Parallel Interface, 10MSPS, -55 to +85 degC, S-44-1, Tray", Generic Part Number=AD9240, Manufacturer="Analog Devices", Supplier Part Number 1=AD9240AS-ND, Channels=1, Code_JEDEC=MS-022-AB-1, ComponentLink1Description="Manufacturer URL", ComponentLink1URL=http://www.analog.com/en/index.html, ComponentLink2Description=Datasheet, ComponentLink2URL=http://www.analog.com/static/imported-files/data_sheets/AD9240.pdf, ComponentLink3Description="Package Specification", ComponentLink3URL=http://www.analog.com/static/imported-files/packages/217364S_44_1.pdf, ComponentLink4Description="Product URL", ComponentLink4URL=http://www.analog.com/en/analog-to-digital-converters/ad-converters/ad9240/products/product.html, DatasheetVersion=Rev.B, Interface=Par, Mounting Technology="Surface Mount", PackageDescription="44-Lead Metric Quad Flat Package [MQFP]", PackageReference=S-44-1, PackageVersion=041807-A, Packing=Tray, PartNumber=AD9240AS, Resolution (Bits)=14, RoHS=N, Supplier 1=Digi-Key, Supplier 2=Mouser, Supplier Part Number 2=584-AD9240AS, Throughput Rate (SPS)=10M

## Via types
v1: diameter 0.45, hole 0.2, Top Layer to Bottom Layer, tented both sides, 3291 vias
v2: diameter 0.6, hole 0.3, Top Layer to Bottom Layer, tented both sides, 51 vias
v3: diameter 0.559, hole 0.305, Top Layer to Bottom Layer, tented both sides, 23 vias
v4: diameter 0.5, hole 0.2, Top Layer to Bottom Layer, 8 vias

## Nets (pads, with @x,y where several pads share a name; then routed paths per layer and width w, separated by ;. In a path a pad name is that pad's centre, name@x,y a point inside that pad or via, vN(x,y) a via of type N, cw(c..) or ccw(c..) an arc to the next point about the centre after c; other vN are vias at no path point)
+2.5: C52.1 C53.1 C54.1 J5.1 L7.2 R22.1 R27.2 R28.1 R29.2 R31.2 U11.3 U11.5 | length 194.8
  Top Layer w0.2: U11.3@89.446,39.688 90.868,39.688 90.932,39.751 v2(90.932,39.624)
  Top Layer w0.345: U11.5@89.446,38.417 89.454,38.409 90.877,38.409 v2(90.932,38.354) ; R31.2@90.924,29.972 R28.1@90.924,32.385 90.924,33.901 v2(90.932,33.909) ; v2(94.869,43.688) 95.758,44.577 R27.2@96.25,44.577 96.02,44.807 R29.2@96.02,46.482
  Top Layer w0.5: L7.2@82.042,122.047 82.042,124.079 83.312,125.349 v2(85.471,125.349) ; R31.2@90.924,29.972 90.924,29.599 91.694,28.829 C54.1@96.139,28.829 96.139,29.042 99.223,32.126 101.092,32.126 101.224,32.258 J5.1@109.728,32.258 110.609,31.377 114.808,31.377 114.927,31.496 v2(120.523,31.496)
  Bottom Layer w0.345: v2(90.932,33.909) v2(90.932,38.354) v2(90.932,39.624) 90.932,42.164 92.456,43.688 v2(94.869,43.688)
  Bottom Layer w0.5: v2(85.471,125.349) 119.126,125.349 122.047,122.428 122.047,111.379 118.745,108.077 118.745,94.869 117.475,93.599 117.475,80.899 121.793,76.581 121.793,33.02 120.523,31.75 v2(120.523,31.496)
+3.3: C9.1 C10.1 C11.1 C12.1 C13.1 C57.1 C58.1 C74.2 C75.2 C76.1 L6.2 U2.20 U3.6 U3.7 U3.8 U3.18 U3.19 U10.1 X1.1 X1.4 | length 131
  Top Layer w0.25: U2.20@52.312,72.693 52.312,73.648 52.705,74.041 C74.2@55.626,74.041 55.618,74.049 C75.2@55.618,76.454 ; v2(72.517,78.232) 72.583,78.232 72.837,78.487 U3.6@73.323,78.487 ; U3.18@77.323,81.042 77.815,81.534 C13.1@80.002,81.534
  Top Layer w0.3: U3.6@73.323,78.487 U3.6@73.323,78.538 U3.7@74.073,77.788 ; C9.1@73.787,73.795 C9.1@73.906,73.914 ; U3.8@74.573,77.788 74.573,74.581 C9.1@73.906,73.914 ; U3.19@76.573,81.788 76.962,81.788 77.323,81.427 U3.18@77.323,81.067 ; C76.1@78.994,70.239 78.787,70.446 78.787,72.379 ; X1.1@79.437,72.379 78.787,72.379 ; C9.1@73.906,73.914 75.827,73.914 C12.1@75.946,73.795 76.721,73.795 X1.4@78.137,72.379 78.787,72.379
  Top Layer w0.345: U3.7@74.073,77.788 U3.8@74.573,77.788 ; v2(79.248,82.677) 79.248,82.288 C13.1@80.002,81.534
  Top Layer w0.5: C75.2@55.618,76.454 56.189,77.025 56.189,77.525 56.769,78.105 58.166,78.105 59.436,76.835 66.04,76.835 v2(66.802,76.073) ; v2(79.375,92.202) 81.788,94.615 81.788,112.776 83.566,114.554 92.456,114.554 95.391,117.489 U10.1@95.391,118.843 95.753,119.205 C57.1@95.753,121.92 95.377,122.296 C58.1@95.377,124.714 95.631,124.46 97.79,124.46 100.457,121.793 L6.2@100.965,121.793
  Signal Layer 2 w0.345: v2(66.802,76.073) 68.961,73.914 74.422,73.914 78.232,77.724 78.232,81.661 v2(79.248,82.677)
  Bottom Layer w0.25: C11.1@69.985,81.407 C10.1@69.985,77.978 71.677,77.978 71.927,78.228 72.513,78.228 v2(72.517,78.232)
  Bottom Layer w0.345: v2(66.802,76.073) 68.098,76.073 69.336,77.311 69.336,77.329 C10.1@69.985,77.978
  Bottom Layer w0.5: v2(79.248,82.677) 79.375,82.804 v2(79.375,92.202)
+5: C2.1 C4.1 C16.2 C17.2 C18.1 C19.1 C23.1 C25.2 C26.2 C27.2 C28.2 C31.2 C32.2 C33.2 C34.2 C35.2 C36.2 C37.2 C43.1 C47.1 C48.1 L1.1 L2.1 L4.2 L5.1 R8.1 R11.1 R12.1 R15.1 R16.1 U3.22 U5.7 U5.13 U5.18 U5.24 U6.1 U6.8 U8.3 U8.6 U11.4 U12.15 U13.3 U13.4 U13.6 U13.28 | length 335.9
  Top Layer w0.22: R11.1@52.316,37.084 52.324,37.092 v2(52.324,39.116) 52.324,39.37 53.868,40.914 U5.18@54.819,40.914 ; v2(53.975,44.45) 53.975,44.258 U5.13@54.819,43.414 ; R12.1@57.158,37.211 v2@58.019,38.072 ; v2@58.019,38.1 U5.24@58.019,40.214 ; U5.7@58.019,44.114 59.481,44.114 60.96,45.593 v2(60.96,47.879) 60.833,47.752 R16.1@59.944,47.752 ; v2(86.614,40.386) 86.876,40.124 C18.1@86.876,39.497 ; U13.3@94.628,51.533 94.628,53.226 95.123,53.721 ; U13.4@95.428,51.533 95.428,53.416 95.123,53.721 ; 97.028,56.007 95.758,56.007 95.123,55.372 95.123,53.721
  Top Layer w0.345: v3(75.057,82.423) 75.073,82.407 U3.22@75.073,81.788 ; R8.1@75.827,60.198 v2(77.089,60.198) ; v2(77.597,82.423) 78.359,83.185 C2.1@78.359,84.328 ; v2(78.994,54.483) 78.998,54.479 U12.15@78.998,52.889 ; v2(86.614,47.371) 91.799,47.371 94.529,50.102 94.529,51.435 U13.3@94.628,51.533
  Top Layer w0.35: L1.1@37.846,112.006 37.846,110.744 38.481,110.109 C28.2@42.037,110.109 42.053,110.125 C26.2@45.728,110.125 ; C26.2@45.72,110.117 C26.2@45.728,110.125 ; U6.8@45.856,111.903 45.856,110.253 C26.2@45.728,110.125 ; C25.2@47.625,110.125 C26.2@45.728,110.125 ; C23.1@50.046,35.306 C19.1@50.046,37.084 R11.1@52.316,37.084 ; R12.1@57.158,37.211 58.039,36.33 C33.2@58.039,35.695 C32.2@61.595,35.695 ; C2.1@78.359,84.328 C4.1@80.264,84.328 ; C18.1@86.876,39.497 87.546,39.497 87.985,39.058 89.44,39.058 U11.4@89.446,39.052 ; U8.6@92.524,97.521 85.867,97.521 83.439,99.949 83.439,102.108 84.709,103.378 93.853,103.378 94.615,102.616 94.615,100.711 95.377,99.949 96.647,99.949 98.003,98.593 98.003,97.824 97.917,97.738 97.917,97.521 ; U8.3@96.774,97.521 97.917,97.521 ; U13.6@97.028,51.533 97.028,56.007 U13.28@97.028,63.783 ; C48.1@106.553,97.531 103.391,97.531 C47.1@103.378,97.544 103.355,97.521 97.917,97.521
  Top Layer w0.5: R15.1@44.069,47.506 48.633,47.506 51.308,44.831 53.213,44.831 53.594,44.45 v2(53.975,44.45) ; U6.1@50.156,111.903 50.156,111.751 50.038,111.633 48.768,111.633 47.625,110.49 C25.2@47.625,110.125 47.625,109.527 47.752,109.4 48.567,109.4 49.149,109.982 49.169,109.982 49.262,110.075 50.453,110.075 v2(51.181,109.347) ; C4.1@80.264,84.328 80.645,83.947 81.788,83.947 86.106,88.265 L2.1@86.106,97.491 ; v2(104.521,101.6) 106.299,101.6 L4.2@106.553,101.346 ; C48.1@106.553,97.531 L4.2@106.553,101.346 ; C43.1@109.847,106.807 L5.1@106.299,106.807 106.553,106.553 L4.2@106.553,101.346
  Signal Layer 1 w0.5: v2(77.089,60.198) 77.089,81.915 v2(77.597,82.423)
  Signal Layer 2 w0.5: v2(52.324,39.116) 52.324,42.799 v2(53.975,44.45)
  Bottom Layer w0.22: 55.499,48.006 60.055,48.006 C37.2@60.071,47.99 60.182,47.879 v2(60.96,47.879) 60.96,40.632 C16.2@61.333,40.259 59.174,38.1 v2(58.039,38.1) 57.158,38.1 C17.2@57.15,38.108
  Bottom Layer w0.345: v2(60.96,47.879) 73.279,60.198 v2(77.089,60.198) 78.994,58.293 ; v3(75.057,82.423) v2(77.597,82.423) ; v2(78.994,54.483) 78.994,58.293 ; v2(86.614,40.386) v2(86.614,47.371) 86.614,50.673 78.994,58.293
  Bottom Layer w0.5: v2(51.181,109.347) 58.928,101.6 v2(104.521,101.6) ; v2(52.324,39.116) C36.2@52.324,38.108 C17.2@57.15,38.108
+12: C42.1 J6.1 L3.2 U1.5 | length 68.2
  Top Layer w0.345: v2(59.944,80.899) 59.944,81.92 U1.5@60.452,82.428 ; v2(100.711,84.201) 103.251,84.201 L3.2@103.505,84.455
  Top Layer w0.35: L3.2@103.505,84.455 106.418,84.455 C42.1@106.672,84.201 106.672,79.891 J6.1@106.68,79.883
  Bottom Layer w0.345: v2(59.944,80.899) 59.944,90.043 64.135,94.234 81.153,94.234 91.44,83.947 100.457,83.947 v2(100.711,84.201)
AD_1: J1.1 U13.24 | length 19.6
  Top Layer w0.345: U13.24@100.228,63.783 100.228,64.795 101.854,66.421 108.331,66.421 115.189,73.279 J1.1@115.189,73.406
AD_2: J1.2 U13.23 | length 17.1
  Top Layer w0.345: U13.23@101.028,63.783 108.106,63.783 J1.2@115.189,70.866
AD_3: J1.3 U13.22 | length 14.8
  Top Layer w0.345: U13.22@103.153,61.658 107.886,61.658 114.554,68.326 J1.3@115.189,68.326
AD_4: J1.4 U13.21 | length 14.1
  Top Layer w0.345: U13.21@103.153,60.858 103.153,60.956 110.359,60.956 J1.4@115.189,65.786
AD_5: J1.5 U13.20 | length 13.4
  Top Layer w0.345: U13.20@103.153,60.058 111.493,60.058 114.681,63.246 J1.5@115.189,63.246
AD_6: J1.6 U13.19 | length 12.8
  Top Layer w0.345: U13.19@103.153,59.258 113.36,59.258 114.998,60.896 J1.6@115.189,60.706
AD_7: J1.7 U13.18 | length 12.2
  Top Layer w0.345: U13.18@103.153,58.458 114.897,58.458 J1.7@115.189,58.166
AD_8: J1.8 U13.17 | length 12.9
  Top Layer w0.345: U13.17@103.153,57.658 113.157,57.658 J1.8@115.189,55.626
AD_9: J1.9 U13.16 | length 13.6
  Top Layer w0.345: U13.16@103.153,56.858 111.417,56.858 J1.9@115.189,53.086
AD_10: J1.10 U13.15 | length 14.3
  Top Layer w0.345: U13.15@103.153,56.058 109.677,56.058 J1.10@115.189,50.546
AD_11: J1.11 U13.14 | length 15
  Top Layer w0.345: U13.14@103.153,55.258 107.937,55.258 J1.11@115.189,48.006
AD_12: J1.12 U13.13 | length 15.8
  Top Layer w0.345: U13.13@103.153,54.458 106.197,54.458 J1.12@115.189,45.466
AD_13: J1.13 U13.12 | length 16.5
  Top Layer w0.345: U13.12@103.153,53.658 104.457,53.658 J1.13@115.189,42.926
AD_14: J1.14 U13.11 | length 18.8
  Top Layer w0.345: U13.11@101.028,51.533 104.042,51.533 J1.14@115.189,40.386
AD_CLK: J1.16 U13.7 | length 24.9
  Top Layer w0.345: U13.7@97.828,51.533 97.926,51.434 97.926,50.102 112.722,35.306 J1.16@115.189,35.306
AD_OTR: J1.15 U13.25 | length 32.6
  Top Layer w0.345: v2(99.314,61.087) 99.428,61.201 U13.25@99.428,63.783
  Bottom Layer w0.345: v2(99.314,61.087) 99.314,53.721 J1.15@115.189,37.846
ADF_CE: J1.23 U3.13 | length 48.8
  Top Layer w0.25: U3.13@77.323,78.538 78.307,78.538 79.756,77.089 v2(84.455,77.089)
  Bottom Layer w0.25: v2(84.455,77.089) 96.647,77.089 114.3,59.436 116.459,59.436 J1.23@117.729,58.166
ADF_CLK: J1.22 U3.14 | length 48.4
  Top Layer w0.25: U3.14@77.323,79.038 78.569,79.038 79.927,77.68 83.466,77.68 83.637,77.851 v2(83.947,77.851)
  Bottom Layer w0.25: v2(83.947,77.851) 98.679,77.851 114.681,61.849 116.967,61.849 117.729,61.087 J1.22@117.729,60.706
ADF_DATA: J1.21 U3.15 | length 47.3
  Top Layer w0.25: U3.15@77.323,79.538 78.831,79.538 80.01,78.359 v2(83.185,78.359)
  Bottom Layer w0.25: v2(83.185,78.359) 83.356,78.53 100.286,78.53 114.173,64.643 116.332,64.643 J1.21@117.729,63.246
ADF_LE: J1.20 U3.16 | length 46.5
  Top Layer w0.25: U3.16@77.323,80.038 79.093,80.038 80.181,78.95 82.252,78.95 v2(82.423,79.121)
  Bottom Layer w0.25: v2(82.423,79.121) 102.616,79.121 114.166,67.571 114.166,67.444 114.413,67.197 116.318,67.197 J1.20@117.729,65.786
ADF_MUXOUT: J1.19 U3.17 | length 45.6
  Top Layer w0.25: U3.17@77.323,80.538 79.355,80.538 80.264,79.629 v2(81.661,79.629)
  Bottom Layer w0.25: v2(81.661,79.629) 81.832,79.8 103.969,79.8 114.046,69.723 116.332,69.723 J1.19@117.729,68.326
ADF_REF: U3.9 X1.3 | length 5.8
  Top Layer w0.3: U3.9@75.073,77.788 75.073,76.184 75.819,75.438 77.216,75.438 78.137,74.517 X1.3@78.137,74.079
ADF_TXDATA: J1.24 U3.12 | length 50.3
  Top Layer w0.25: U3.12@76.573,77.788 77.914,77.788 79.502,76.2 v2(84.455,76.2)
  Bottom Layer w0.25: v2(84.455,76.2) 93.98,76.2 113.157,57.023 116.332,57.023 J1.24@117.729,55.626